# EAGLE board logica (EAGLE 6.1)

Size 160 x 100 mm. Coordinates in mm from the lower left corner, seen from the top.
Outline: 0,0 160,0 160,100 0,100 0,0
Copper layers (1*16): Top 0.035mm / dielectric 1.5mm / Bottom 0.035mm
Design rules: minimum track width 10mil, minimum drill 24mil, track to track 8mil, track to pad 8mil, pad to pad 8mil, via to via 8mil, smd to smd 8mil, copper to edge 40mil, drill to drill 8mil, minimum pad ring 10mil, minimum via ring 8mil, stop-mask expansion 4mil, vias tented up to drill 0mil, thermal gap 10mil

## Footprints (pad centres in the part's own frame; a part is rotated, then mirrored left to right if it is on the bottom)
DUEMILANOVE_SHIELD_LONGPADS = drill 1.016 pad 1.88 long: 3.3V 50.8,26.67; 5V 50.8,29.21; A0 50.8,41.91; A1 50.8,44.45; A2 50.8,46.99; A3 50.8,49.53; A4 50.8,52.07; A5 50.8,54.61; AREF 2.54,15.24; D2 2.54,49.53; D3 2.54,46.99; D4 2.54,44.45; D5 2.54,41.91; D6 2.54,39.37; D7 2.54,36.83; D8 2.54,33.02; D9 2.54,30.48; D10 2.54,27.94; D11 2.54,25.4; D12 2.54,22.86; D13 2.54,20.32; GND@0 50.8,31.75; GND@1 50.8,34.29; GND@2 2.54,17.78; RES 50.8,24.13; RX 2.54,54.61; TX 2.54,52.07; VIN 50.8,36.83 | hole 3.302: 45.72,57.15; 2.54,6.35
LEVEL-CONVERTER = drill 0.8 long: P$1 -1.27,13.97; P$2 -1.27,11.43; P$3 -1.27,8.89; P$4 -1.27,6.35; P$5 -1.27,3.81; P$6 -1.27,1.27; P$7 8.89,1.27; P$8 8.89,3.81; P$9 8.89,6.35; P$10 8.89,8.89; P$11 8.89,11.43; P$12 8.89,13.97
IMU3000-COMBO = drill 0.8 long: 3V3 1.27,6.35; AXINT1 1.27,19.05; AXINT2 1.27,21.59; IMUINT 1.27,16.51; SCL 1.27,13.97; SDA 1.27,11.43; VSS 1.27,8.89 | hole 3.2: 2.54,25.4; 17.78,25.4; 17.78,2.54; 2.54,2.54

## Placement (x,y rotation side)
U1  ARDUINO_SHIELDLONGPADS  [DUEMILANOVE_SHIELD_LONGPADS]  160.02,2.54 90 top
U$1  LOGIC-LEVEL-CONVERTER  [LEVEL-CONVERTER]  87.63,40.64 0 top
U$2  IMU3000COMBO  [IMU3000-COMBO]  90.17,76.2 90 top

## Library data of the parts
U1 = SparkFun
U$1 U$2 = aasanchez

## Nets
3V3: U1.3.3V U$1.P$3 U$2.3V3
N$1: U$1.P$1 U$2.SCL
N$2: U$1.P$6 U$2.SDA
SCL: U1.A5 U$1.P$12
SDA: U1.A4 U$1.P$7
VDD: U1.5V U$1.P$10
VSS: U1.GND@0 U1.GND@1 U1.GND@2 U$1.P$4 U$2.VSS
: U$1.P$9

## Tracks (layer width: path | path; a pad name or v marks a point on that pad's centre or on a via)
3V3  (2 unrouted)
N$1  (1 unrouted)
N$2  (1 unrouted)
SCL  (1 unrouted)
SDA  (1 unrouted)
VDD  (1 unrouted)
VSS  (4 unrouted)